# Altium PCB PCB2.PcbDoc
Units mil, origin at the board's own origin, x right, y up, seen from the top; angles counter-clockwise.
Board outline 1095 x 585 mil, 2 copper layers (Top Layer, Bottom Layer); 6 components, 7 nets, 19 pads, 0 vias.
Unrouted connection lines stored in the file: 1.
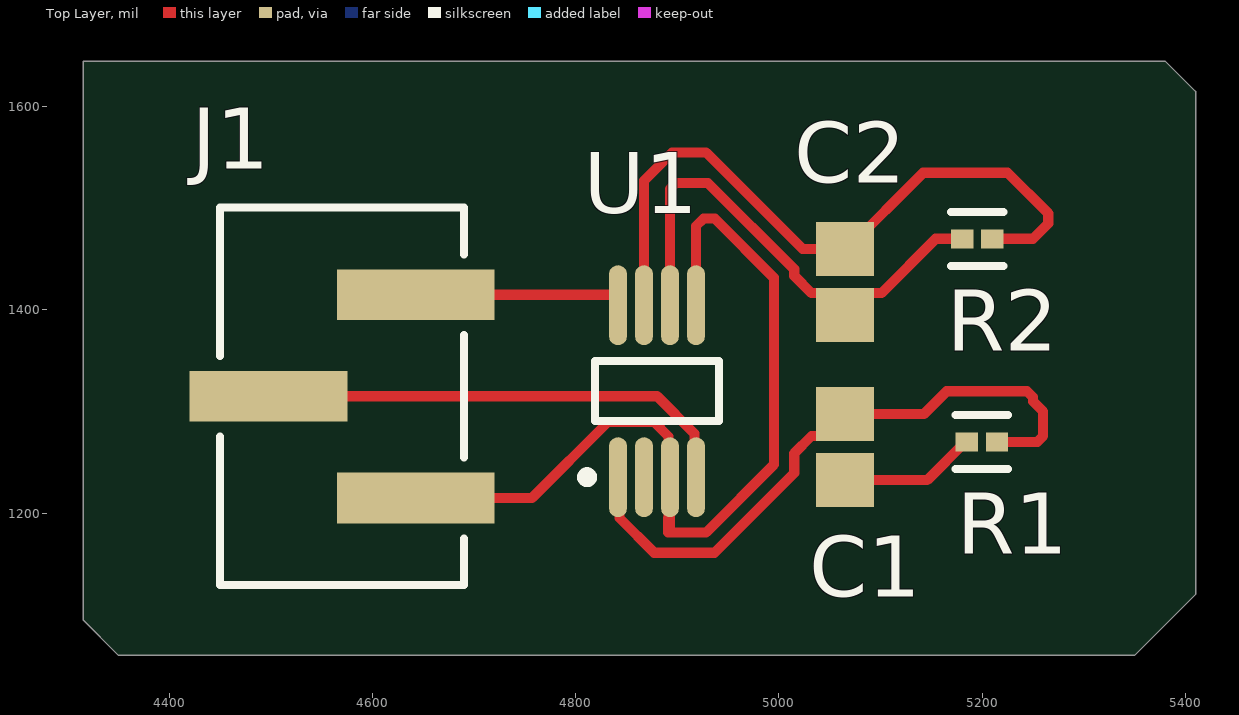
[diagram p0: Top Layer view]
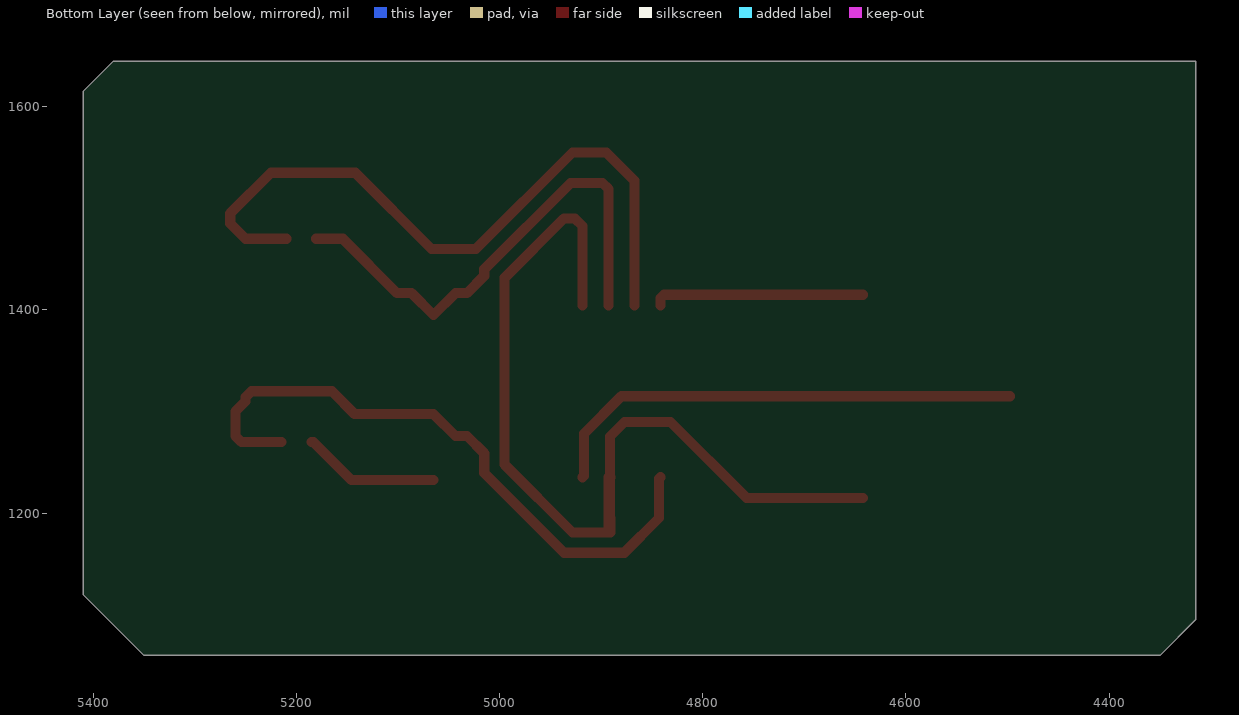
[diagram p1: Bottom Layer view, seen from below]
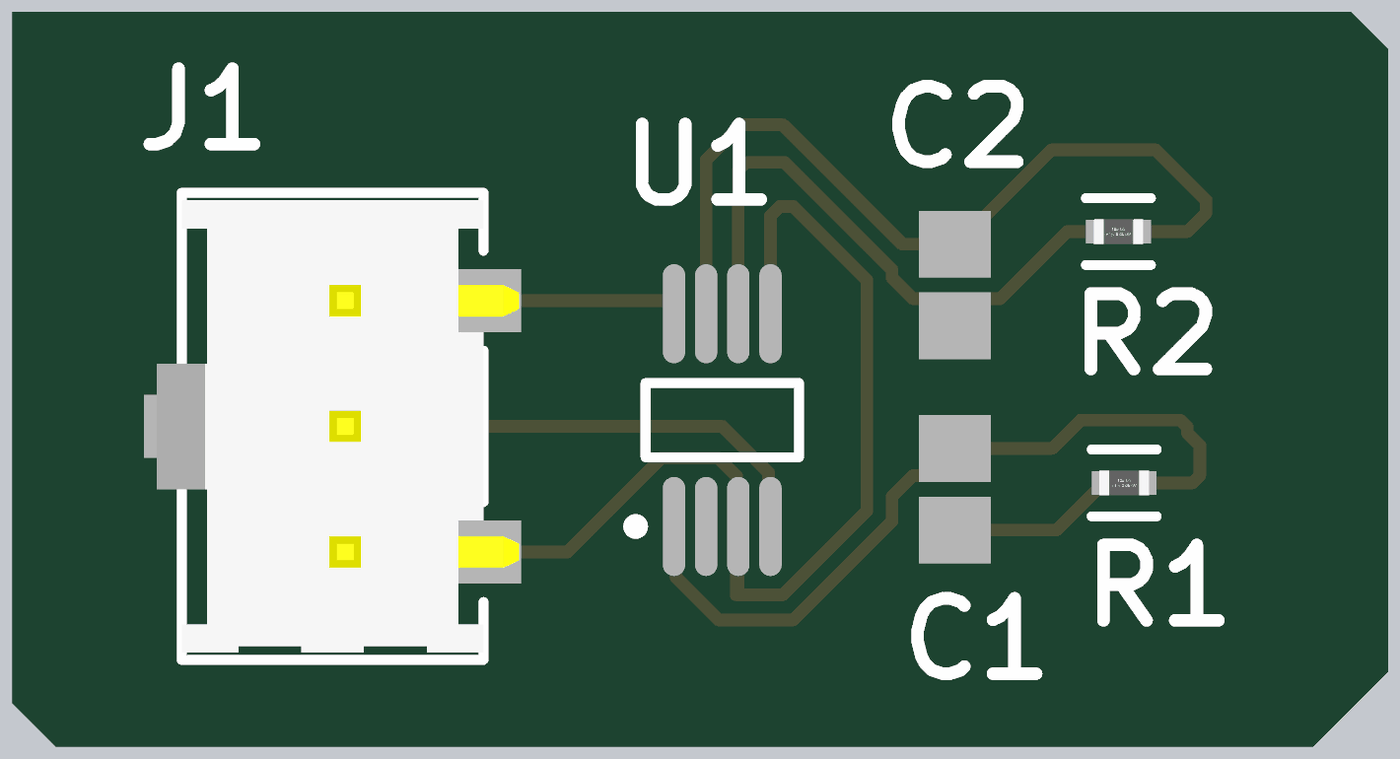
[diagram p2: 3D render of the assembled board from above, using the file's embedded part models]

## Layer stack, top to bottom
Top Solder: solder mask 0.4, Solder Resist, Dk 3.5
Top Layer: signal copper 1.4
Dielectric 1: dielectric 12.6, FR-4, Dk 4.8
Bottom Layer: signal copper 1.4
Bottom Solder: solder mask 0.4, Solder Resist, Dk 3.5

## Board outline
4315,1095 4350,1060 5350,1060 5410,1120 5410,1615 5380,1645 4315,1645

## Design rules (kind name [scope] priority, off if disabled: settings)
Clearance [All] p1: gap=10 ignorepadtopadclearanceinfootprint=FALSE
PolygonConnect [All] p1: connectstyle=Relief reliefconductorwidth=10 reliefentries=4 polygonreliefangle="90 Angle" airgapwidth=10
RoutingVias [All] p1: holewidth=28 width=50 viastyle="Through Hole" minholewidth=28 minwidth=50 maxholewidth=28 maxwidth=50
SolderMaskExpansion [All] p1: expansion=0 istentingtop=FALSE
SupplyNets "Schematic Supply Nets" [InNet('GND')] p1: voltage=0.000
Width [All] p1: maxlimit=10 minlimit=10 preferedwidth=10
30 further rules are at their usual default settings.

## Components (designator, comment, footprint, x,y, rotation, side; value= is the part's Value field where it differs from the comment)
C1 "08051A100CAT2A" CAPC2013X94X50NL20T25 5065,1265 r90 top
C2 "08051A100CAT2A" CAPC2013X94X50NL20T25 5065,1427.48 r90 top
J1 "IPL1-103-02-L-S-K" FP-IPL1-103-02-L-S-K-0 4570,1315 r0 top
R1 "CRGCQ0402F100K" FP-CRGCQ0402-IPC_C 5199.81,1270 r0 top value=100KΩ
R2 "CRGCQ0402F100K" FP-CRGCQ0402-IPC_C 5195.19,1470 r0 top value=100KΩ
U1 "MCP6002-E/MS" MSOP-MS8_M 4880,1320 r90 top

## Footprints (in the part's own frame and the unit in brackets; to place one, negate y for a bottom-side part, rotate by r counter-clockwise, add the part's x,y. Pads: shape width x height; smd on the part's side, far side on the other; paste and mask are expansions set on the pad)
CAPC2013X94X50NL20T25 [mm] "Chip Capacitor, 2-Leads, Body 2.01x1.25mm, IPC Medium Density"
  rect 1.35x1.45 smd: 1(-0.825,0) 2(0.825,0)
  body extent -1.1,-0.72 1.11,0.72, height 0.94
FP-CRGCQ0402-IPC_C [mil]
  rect 22.03x18.6 smd paste+0 mask+0: 1(-14.81,0) 2(14.81,0)
  silkscreen extent -26,-27 26,27, body extent -30,-15 30,15, height 10
FP-IPL1-103-02-L-S-K-0 [mm]
  rect 3.94x1.27 smd paste+0 mask+0: 1(1.84,2.54) 2(-1.84,0) 3(1.84,-2.54)
  silkscreen extent -3.05,-4.72 3.05,4.72, body extent -3.91,-4.82 3.91,4.82, height 0.25
MSOP-MS8_M [mm] "TSOP, 8-Leads, Body 3x3mm, Pitch 0.65mm, IPC Low Density"
  oval 2x0.45 smd: 1(-2.15,0.975) 2(-2.15,0.325) 3(-2.15,-0.325) 4(-2.15,-0.975) 5(2.15,-0.975) 6(2.15,-0.325) 7(2.15,0.325) 8(2.15,0.975)
  silkscreen extent -2.27,-1.55 0.75,1.87, body extent -1.55,-1.55 1.55,1.55, height 1.1

## Part data
C1 C2: library part CMP-2007-04114-1, Manufacturer="AVX Interconnect / Elco", Part Number=08051A100CAT2A
J1: library part CMP-02766-000522-1, "3 Position 1 Row .100\" (2.54 mm) pitch connector", Max Current Rating=7.4A, Max Operating Temperature=125°C, Max Voltage Rating (AC)=675V, Min Operating Temperature=-55°C, Contact Material=Bronze, Contact Plating=Gold, Depth=7.04mm, Gender=Male, Housing Material=Polymer, Length=9.14mm, Mount="Surface Mount", Number of Contacts=3, Number of Ports=1, Number of Terminals/Pins=3, Orientation=Straight, Packaging=Bulk, Pitch=2.54mm, Radiation Hardening=No, Termination=Solder
R1 R2: library part CMP-03211-001412-1, "CRGCQ0402 100KΩ 1% ±100ppm/°C 50V", Ambient Temperature Range High=+70°C, Manufacturer="TE Connectivity", Package=CRGCQ0402, Power Rating=0.0625W, Resistance=100KΩ, Temperature="-55°C to +155°C", Temperature Coefficient=±100ppm/°C, Temperature Range High=+155°C, Temperature Range Low=-55°C, Tolerance=0.01, Voltage Rating=50V, Automotive=Yes, Category=Res, ComponentLink2Description=Datasheet, ComponentLink2URL=https://www.te.com/commerce/DocumentDelivery/DDEController?Action=showdoc&DocId=Data+Sheet%7F1773204-3%7F1%7Fpdf%7FEnglish%7FENG_DS_1773204-3_1.pdf%7F4-2176347-1150, Composition="Thick Film", Device Class L1="Passive Components", Device Class L2=Resistors, Device Class L3="Chip SMD Resistors", Height=0.4mm, Ipc Land Pattern Name=RESC10050X35, Lead Free=Yes, Manufacturer Part Number=CRGCQ0402F100K, Octopart=https://octopart.com/crgcq0402f100k-te+connectivity-91017930, RoHS=TRUE, Series=CRGCQ
U1: library part CMP-0187-00576-3, "None", Case/Package=MSOP, Input Bias Current=1pA, Input Offset Voltage (Vos)=4.5mV, Max Operating Temperature=125°C, Max Supply Voltage=6V, Min Operating Temperature=-40°C, Min Supply Voltage=1.8V, Nominal Supply Current=100uA, Operating Supply Voltage=5.5V, Output Current=23mA, Package Quantity=100, Power Supply Rejection Ratio (PSRR)=86dB, Voltage Gain=112dB, Amplifier Type="GENERAL PURPOSE", Bandwidth=1MHz, Common Mode Rejection Ratio=60dB, Gain Bandwidth Product=1MHz, Height=0.95mm, Input Offset Voltage-Max=4.5mV, Lead Free="Lead Free", Length=3mm, Mount="Surface Mount", Number of Amplifiers=2, Number of Channels=2, Number of Circuits=2, Number of Elements=2, Number of Pins=8, Packaging=Rail/Tube, Radiation Hardening=No, REACH SVHC="No SVHC", RoHS Compliant=Yes, Slew Rate=0.6V/µs, Slew Rate-Nom=0.6V/µs, Supply Current=100uA, Technology=CMOS, Unity Gain Bandwidth Product=1MHz, Width=3mm

## Nets (pads, with @x,y where several pads share a name; then routed paths per layer and width w, separated by ;. In a path a pad name is that pad's centre, name@x,y a point inside that pad or via, vN(x,y) a via of type N, cw(c..) or ccw(c..) an arc to the next point about the centre after c; other vN are vias at no path point)
+3V5: J1.1 U1.8 | length 207.4
  Top Layer w10: J1.1 4838.05,1415 4841.61,1411.44 U1.8
-3V5: J1.2 U1.4 | length 478
  Top Layer w10: J1.2 4880.1,1315 4916.91,1278.19 4916.91,1236.83 U1.4
GND: J1.3 U1.3 U1.5 | length 932.2
  Top Layer w10: J1.3 4757.01,1215 4831.73,1289.72 4877.09,1289.72 4891.32,1275.49 4891.32,1235.61 4891.06,1235.35 4891.32,1235.1 4891.32,1195.22 4891.06,1194.96 4891.06,1180.98 4892.8,1180.98 ; U1.3 4892.8,1194.96 4892.8,1180.98 ; U1.5 4918.39,1482.53 4925.86,1490 4936.72,1490 4995,1431.72 4995,1247.72 4928.27,1180.98 4892.8,1180.98
I1: C1.1 R1.1 U1.2 | length 135.5
  Top Layer w10: C1.1 5145.8,1232.52 5183.28,1270 R1.1
I2: C2.1 R2.1 U1.6 | length 493.1
  Top Layer w10: U1.6 4892.8,1519.14 4898.65,1525 4930,1525 5015,1440 5015,1433.63 5032.05,1416.57 5043.43,1416.57 C2.1 5086.57,1416.57 5100.93,1416.57 5154.36,1470 R2.1
NetC1_2: C1.2 R1.2 U1.1 | length 631.7
  Top Layer w10: U1.1 4843.09,1233.88 4843.09,1195.22 4877.32,1160.98 4936.55,1160.98 5015,1239.43 5015,1258.85 5032.05,1275.91 5043.43,1275.91 C1.2 5142.48,1297.48 5165,1320 5244.14,1320 5250,1314.14 5250,1310 5260,1300 5260,1275.86 5254.14,1270 R1.2
NetC2_2: C2.2 R2.2 U1.7 | length 688.1
  Top Layer w10: U1.7 4867.2,1527.2 4895,1555 4928.28,1555 5023.32,1459.96 C2.2 ; C2.2@5066.97,1459.96 5142.01,1535 5225,1535 5265,1495 5265,1485 5250,1470 R2.2

## Silkscreen, mask and mechanical layers (free items; w line width, h text height)
Mechanical 1:
  the board outline again, w10